# EAGLE board Ej3_EM_Capacitor (EAGLE 9.7.0)

Size 191.64 x 51.63 mm. Coordinates in mm from the lower left corner, seen from the top.
Outline: 0,0 191.64,0 191.64,51.63 0,51.63 0,0
Copper layers (1*16): Top 0.035mm / dielectric 1.5mm / Bottom 0.035mm
Design rules "default": minimum track width 6mil, minimum drill 0.35mm, track to track 6mil, track to pad 6mil, pad to pad 6mil, via to via 6mil, smd to smd 6mil, copper to edge 40mil, drill to drill 6mil, minimum pad ring 10mil, minimum via ring 8mil, stop-mask expansion 4mil, vias tented up to drill 0mil, thermal gap 10mil

## Footprints (pad centres in the part's own frame; a part is rotated, then mirrored left to right if it is on the bottom)
CAP-THRU-2.54MM = drill 1.016 pad 1.88: 1 -1.27,0; 2 1.27,0
LEDRD254W60D565H860B = drill 0.981 pad 1.581: 1 -1.27,0; 2 1.27,0
BATTERY-GENERIC = drill 1.118 pad 3.15 octagon: + 2.54,0; - -2.54,0
RESAD1016W63L850D250B = drill 0.83 pad 1.43: 1 -5.08,0; 2 5.08,0
SWITCH-SPDT-PTH-8.5X3.7MM = drill 1.016 pad 1.88: 1 -2.54,0; 2 0,0; 3 2.54,0

## Placement (x,y rotation side)
C1  47m  [CAP-THRU-2.54MM]  68.89,16.59 0 top
D1  RED  [LEDRD254W60D565H860B]  96.83,14.05 180 top
P1  BATTERYGENERIC  [BATTERY-GENERIC]  8.26,43.38 180 top
R1  10  [RESAD1016W63L850D250B]  67.62,8.97 90 top
R2  1k  [RESAD1016W63L850D250B]  98.1,8.97 90 top
S1  TOGGLE  [SWITCH-SPDT-PTH-8.5X3.7MM]  184.22,14.7 0 top
S2  TOGGLE  [SWITCH-SPDT-PTH-8.5X3.7MM]  21.18,29.22 0 top

## Library data of the parts
C1 P1 R1 R2 S1 S2 = Tinkercad
D1 = Tinkercad; CATEGORY: Opto-Electronic; SUB-CATEGORY: LED; VALUE: LED_RED

## Nets
C1_1: C1.1 R1.2
D1_A: D1.1 R2.2
P1+: P1.+ S2.2
P1-: D1.2 P1.- R1.1
S2_S: C1.2 R2.1 S2.3

## Tracks (layer width: path | path; a pad name or v marks a point on that pad's centre or on a via)
C1_1  (1 unrouted)
D1_A  (1 unrouted)
P1+  (1 unrouted)
P1-  (2 unrouted)
S2_S  (2 unrouted)